# Altium PCB TRUMAN_PCB.PcbDoc (part 2 of 5)
Units mil, origin at the board's own origin, x right, y up, seen from the top; angles counter-clockwise.
Board outline 8050 x 5340 mil, 2 copper layers (Top Layer, Bottom Layer); 272 components, 210 nets, 840 pads, 280 vias.
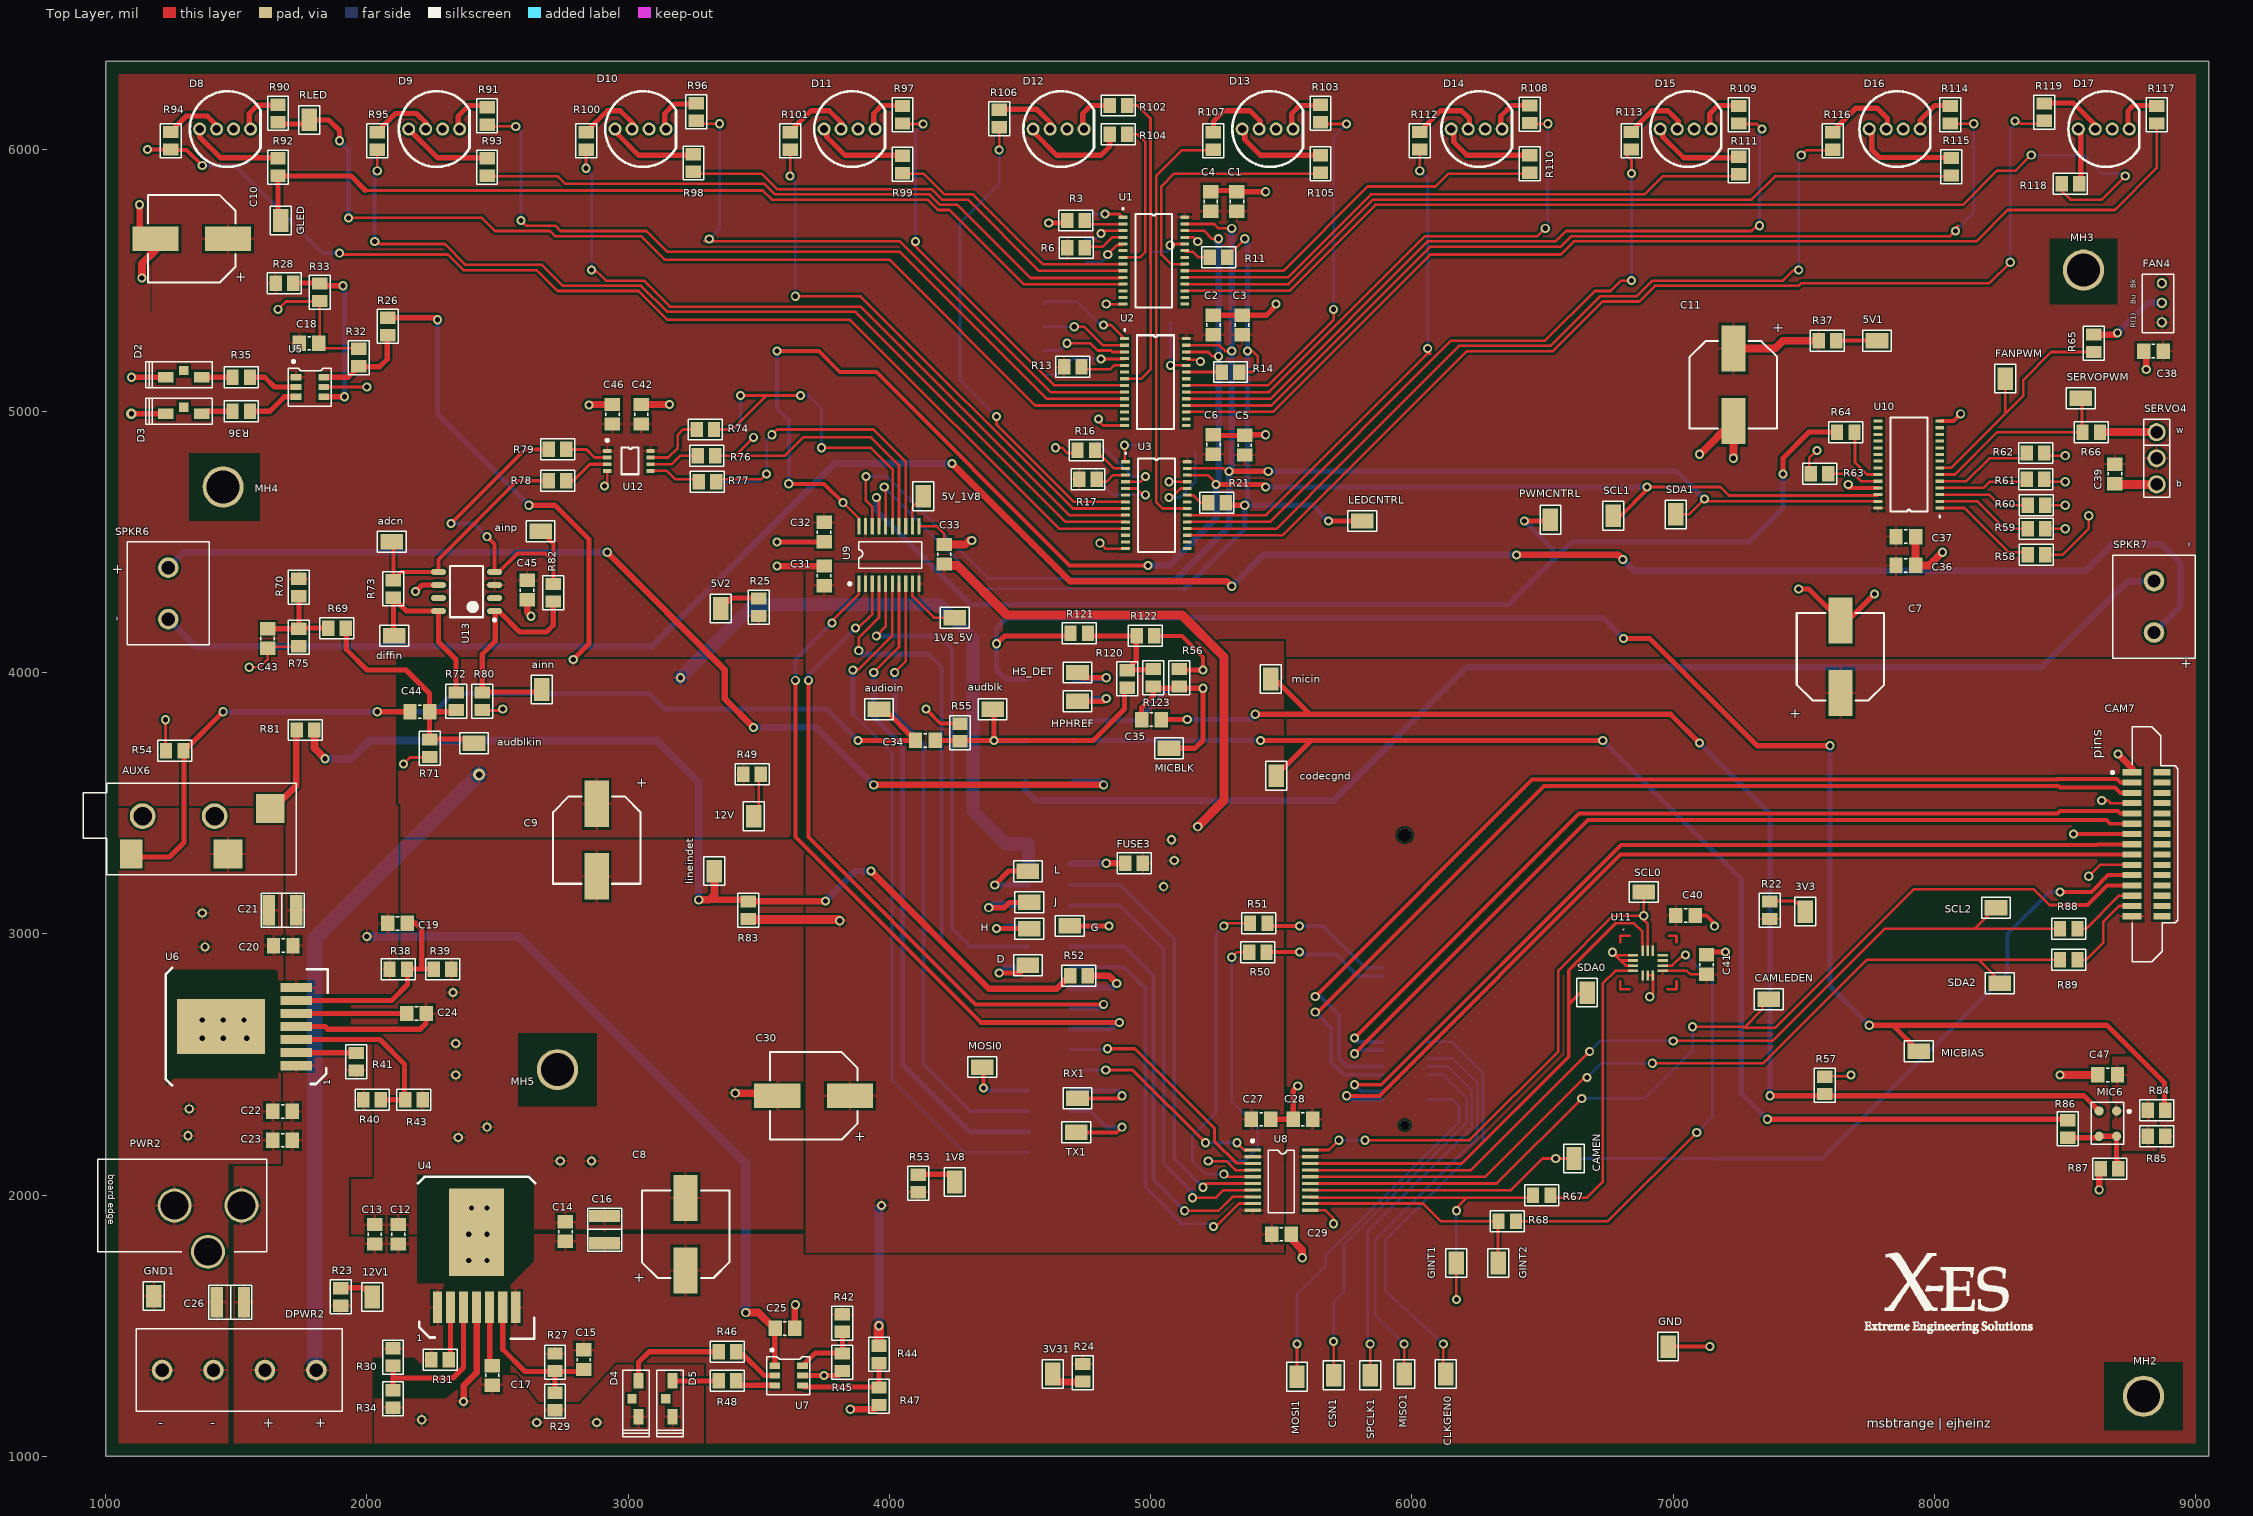
[diagram p0: Top Layer view]

## Part data (continued)
R1 R2 R3 R4 R5 R6 R7 R8 R9 R10 R11 R12 R13 R14 R15 R16 R17 R18 R19 R20 R21 R52 R54 R57 R58 R59 R60 R61 R62 R63 R64 R66 R67 R68 R69 R70 R75 R83: "RES, THICK FILM, 10K, 5%, 0.125W, 0805", Case/Package=0805, Case Code (Metric)=2012, Manufacturer=Yageo, Manufacturer Part Number=RC0805JR-0710KL, Max Operating Temperature=155°C, Min Operating Temperature=-55°C, Power Rating=125mW, Resistance=10K, Supplier Part Number 1=311-10KARCT-ND, Temperature Coefficient=100ppm/°C, Tolerance=5%, Voltage Rating=150V, Case Code (Imperial)=0805, ComponentLink1Description=https://datasheet.ciiva.com/7983/444164-7983765.pdf, ComponentLink1URL=https://datasheet.ciiva.com/7983/444164-7983765.pdf, ComponentLink2Description=https://datasheet.ciiva.com/7941/444164-7941870.pdf, ComponentLink2URL=https://datasheet.ciiva.com/7941/444164-7941870.pdf, ComponentLink3Description=https://datasheet.ciiva.com/7941/444164-7941871.pdf, ComponentLink3URL=https://datasheet.ciiva.com/7941/444164-7941871.pdf, Composition="Thick Film", Contact Plating=Tin,Matte, Depth=1.25mm, Height=0.5mm, Lead Free="Lead Free", Length=2mm, Military Standard=Not, Packaging="Tape and Reel", Pricing 1="1=0.1, 10=0.019, 100=0.0076, 1000=0.0034, 2500=0.003 (USD)", Radiation Hardening=No, REACH SVHC=Unknown, Stock 1=1285290, Supplier 1=Digi-Key, Termination=SMD/SMT, Width=1.25mm
R22 R23 R24 R25 R37 R39 R49 R53: "RES SMD 1K OHM 1% 1/8W 0805", Case/Package=0805, Case Code (Metric)=2012, Manufacturer=Yageo, Manufacturer Part Number=RC0805FR-071KL, Max Operating Temperature=155°C, Max Power Dissipation=125mW, Min Operating Temperature=-55°C, Package Quantity=1, Resistance=1KR, Supplier Part Number 1=311-1.00KCRCT-ND, Temperature Coefficient=100ppm/°C, Tolerance=1%, Voltage Rating=150V, =1K, Case Code (Imperial)=0805, ComponentLink1Description=https://datasheet.ciiva.com/2456/pyu-r-int-thick-7-2456976.pdf, ComponentLink1URL=https://datasheet.ciiva.com/2456/pyu-r-int-thick-7-2456976.pdf, ComponentLink2Description=https://datasheet.ciiva.com/2456/pyu-r-int-thick-7-2456977.pdf, ComponentLink2URL=https://datasheet.ciiva.com/2456/pyu-r-int-thick-7-2456977.pdf, ComponentLink3Description=https://datasheet.ciiva.com/11819/0900766b8106beab-11819814.pdf, ComponentLink3URL=https://datasheet.ciiva.com/11819/0900766b8106beab-11819814.pdf, ComponentLink4Description=https://datasheet.ciiva.com/7941/1686128-7941719.pdf, ComponentLink4URL=https://datasheet.ciiva.com/7941/1686128-7941719.pdf, ComponentLink5Description=https://datasheet.ciiva.com/16850/rc0805-16850409.pdf, ComponentLink5URL=https://datasheet.ciiva.com/16850/rc0805-16850409.pdf, ComponentLink6Description=https://datasheet.ciiva.com/46385/444164-46385020.pdf, ComponentLink6URL=https://datasheet.ciiva.com/46385/444164-46385020.pdf, ComponentLink7Description=https://datasheet.ciiva.com/2456/pyu-r-int-thick-7-2456975.pdf, ComponentLink7URL=https://datasheet.ciiva.com/2456/pyu-r-int-thick-7-2456975.pdf, Composition="Thick Film", Depth=1.25mm, Height=0.024inch, Lead Free="Lead Free", Length=0.079inch, Military Standard=Not, Number of Pins=2, Number of Terminations=2, Packaging="Tape and Reel", Power Rating=125mW, Pricing 1="1=0.1, 10=0.022, 100=0.0088, 1000=0.004, 2500=0.0034 (USD)", REACH SVHC=Unknown, Stock 1=6122451, Supplier 1=Digi-Key, Termination=SMD/SMT, Voltage Rating (DC)=150V, Width=0.049inch
R26 R47: "RES SMD 1.74M OHM 1% 1/8W 0805", Case/Package=0805, Case Code (Metric)=2012, Manufacturer=Yageo, Manufacturer Part Number=RC0805FR-071M74L, Max Operating Temperature=155°C, Max Power Dissipation=125mW, Min Operating Temperature=-55°C, Package Quantity=1, Resistance=1.74MR, Supplier Part Number 1=311-1.74MCRCT-ND, Temperature Coefficient=100ppm/°C, Tolerance=1%, Voltage Rating=150V, =1.74M, Case Code (Imperial)=0805, ComponentLink1Description=https://datasheet.ciiva.com/12575/rc0805-257173-12575526.pdf, ComponentLink1URL=https://datasheet.ciiva.com/12575/rc0805-257173-12575526.pdf, ComponentLink2Description=https://datasheet.ciiva.com/2459/pyu-r-int-thick-7-2459082.pdf, ComponentLink2URL=https://datasheet.ciiva.com/2459/pyu-r-int-thick-7-2459082.pdf, ComponentLink3Description=https://datasheet.ciiva.com/2459/pyu-r-int-thick-7-2459083.pdf, ComponentLink3URL=https://datasheet.ciiva.com/2459/pyu-r-int-thick-7-2459083.pdf, ComponentLink4Description=https://datasheet.ciiva.com/2459/pyu-r-int-thick-7-2459084.pdf, ComponentLink4URL=https://datasheet.ciiva.com/2459/pyu-r-int-thick-7-2459084.pdf, Composition="Thick Film", Contact Plating=Tin,Matte, Height=0.024inch, Lead Free="Lead Free", Length=0.079inch, Number of Terminations=2, Packaging="Tape and Reel", Power Rating=125mW, Pricing 1="1=0.1, 10=0.023, 100=0.0095, 1000=0.0043, 2500=0.0037 (USD)", Radiation Hardening=No, Stock 1=24001, Supplier 1=Digi-Key, Termination=SMD/SMT, Voltage Rating (DC)=150V, Width=1.25mm
R27: library part RES_0805_6.2K, "Yageo RC0805 Series Thick Film Surface Mount Resistor 0805 Case 6.2k 1% 0.125W 100ppm/C", Case/Package=0805, Case Code (Metric)=2012, Manufacturer=Yageo, Manufacturer Part Number=RC0805FR-076K2L, Max Operating Temperature=155°C, Min Operating Temperature=-55°C, Package Quantity=5000, Power Rating=125mW, Resistance=6.2KR, Supplier Part Number 1=311-6.20KCRCT-ND, Temperature Coefficient=100ppm/°C, Tolerance=1%, Voltage Rating=150V, =6.2K, Case Code (Imperial)=0805, ComponentLink1Description=https://datasheet.ciiva.com/11809/0900766b8106beab-11809424.pdf, ComponentLink1URL=https://datasheet.ciiva.com/11809/0900766b8106beab-11809424.pdf, ComponentLink2Description=https://datasheet.ciiva.com/16792/rc0805-16792360.pdf, ComponentLink2URL=https://datasheet.ciiva.com/16792/rc0805-16792360.pdf, Composition="Thick Film", Depth=1.25mm, Height=0.5mm, Lead Free="Lead Free", Length=2mm, Military Standard=Not, Packaging="Tape and Reel", Pricing 1="1=0.1, 10=0.022, 100=0.0088, 1000=0.004, 2500=0.0034 (USD)", Stock 1=195580, Supplier 1=Digi-Key, Termination=SMD/SMT, Voltage Rating (DC)=150V, Width=1.25mm
R28: library part RES_0805_1.43M, "RES SMD 1.43M OHM 1% 1/8W 0805", Case/Package=0805, Case Code (Metric)=2012, Manufacturer=Yageo, Manufacturer Part Number=RC0805FR-071M43L, Max Operating Temperature=155°C, Max Power Dissipation=125mW, Min Operating Temperature=-55°C, Package Quantity=1, Resistance=1.43MR, Supplier Part Number 1=311-1.43MCRCT-ND, Temperature Coefficient=100ppm/°C, Tolerance=1%, Voltage Rating=150V, =1.43M, Case Code (Imperial)=0805, ComponentLink1Description=https://datasheet.ciiva.com/2554/pyu-r-int-thick-7-2554432.pdf, ComponentLink1URL=https://datasheet.ciiva.com/2554/pyu-r-int-thick-7-2554432.pdf, ComponentLink2Description=https://datasheet.ciiva.com/12575/rc0805-257173-12575317.pdf, ComponentLink2URL=https://datasheet.ciiva.com/12575/rc0805-257173-12575317.pdf, ComponentLink3Description=https://datasheet.ciiva.com/2554/pyu-r-int-thick-7-2554430.pdf, ComponentLink3URL=https://datasheet.ciiva.com/2554/pyu-r-int-thick-7-2554430.pdf, ComponentLink4Description=https://datasheet.ciiva.com/2554/pyu-r-int-thick-7-2554431.pdf, ComponentLink4URL=https://datasheet.ciiva.com/2554/pyu-r-int-thick-7-2554431.pdf, Composition="Thick Film", Contact Plating=Tin,Matte, Depth=1.25mm, Height=0.024inch, Lead Free="Lead Free", Length=2mm, Military Standard=Not, Number of Terminations=2, Packaging="Tape and Reel", Power Rating=125mW, Pricing 1="1=0.1, 10=0.023, 100=0.0095, 1000=0.0043, 2500=0.0037 (USD)", Radiation Hardening=No, Stock 1=27474, Supplier 1=Digi-Key, Termination=SMD/SMT, Voltage Rating (DC)=150V, Width=0.049inch